# Altium PCB 1000BASET1_MEDIA_CONVERTER.PcbDoc (part 1 of 2)
Units mm, origin at the board's own origin, x right, y up, seen from the top; angles counter-clockwise.
Board outline 96 x 40 mm, 4 copper layers (Top Layer, Mid Layer 1, Mid Layer 2, Bottom Layer), stack 1.586 mm thick; 186 components, 118 nets, 607 pads, 487 vias.
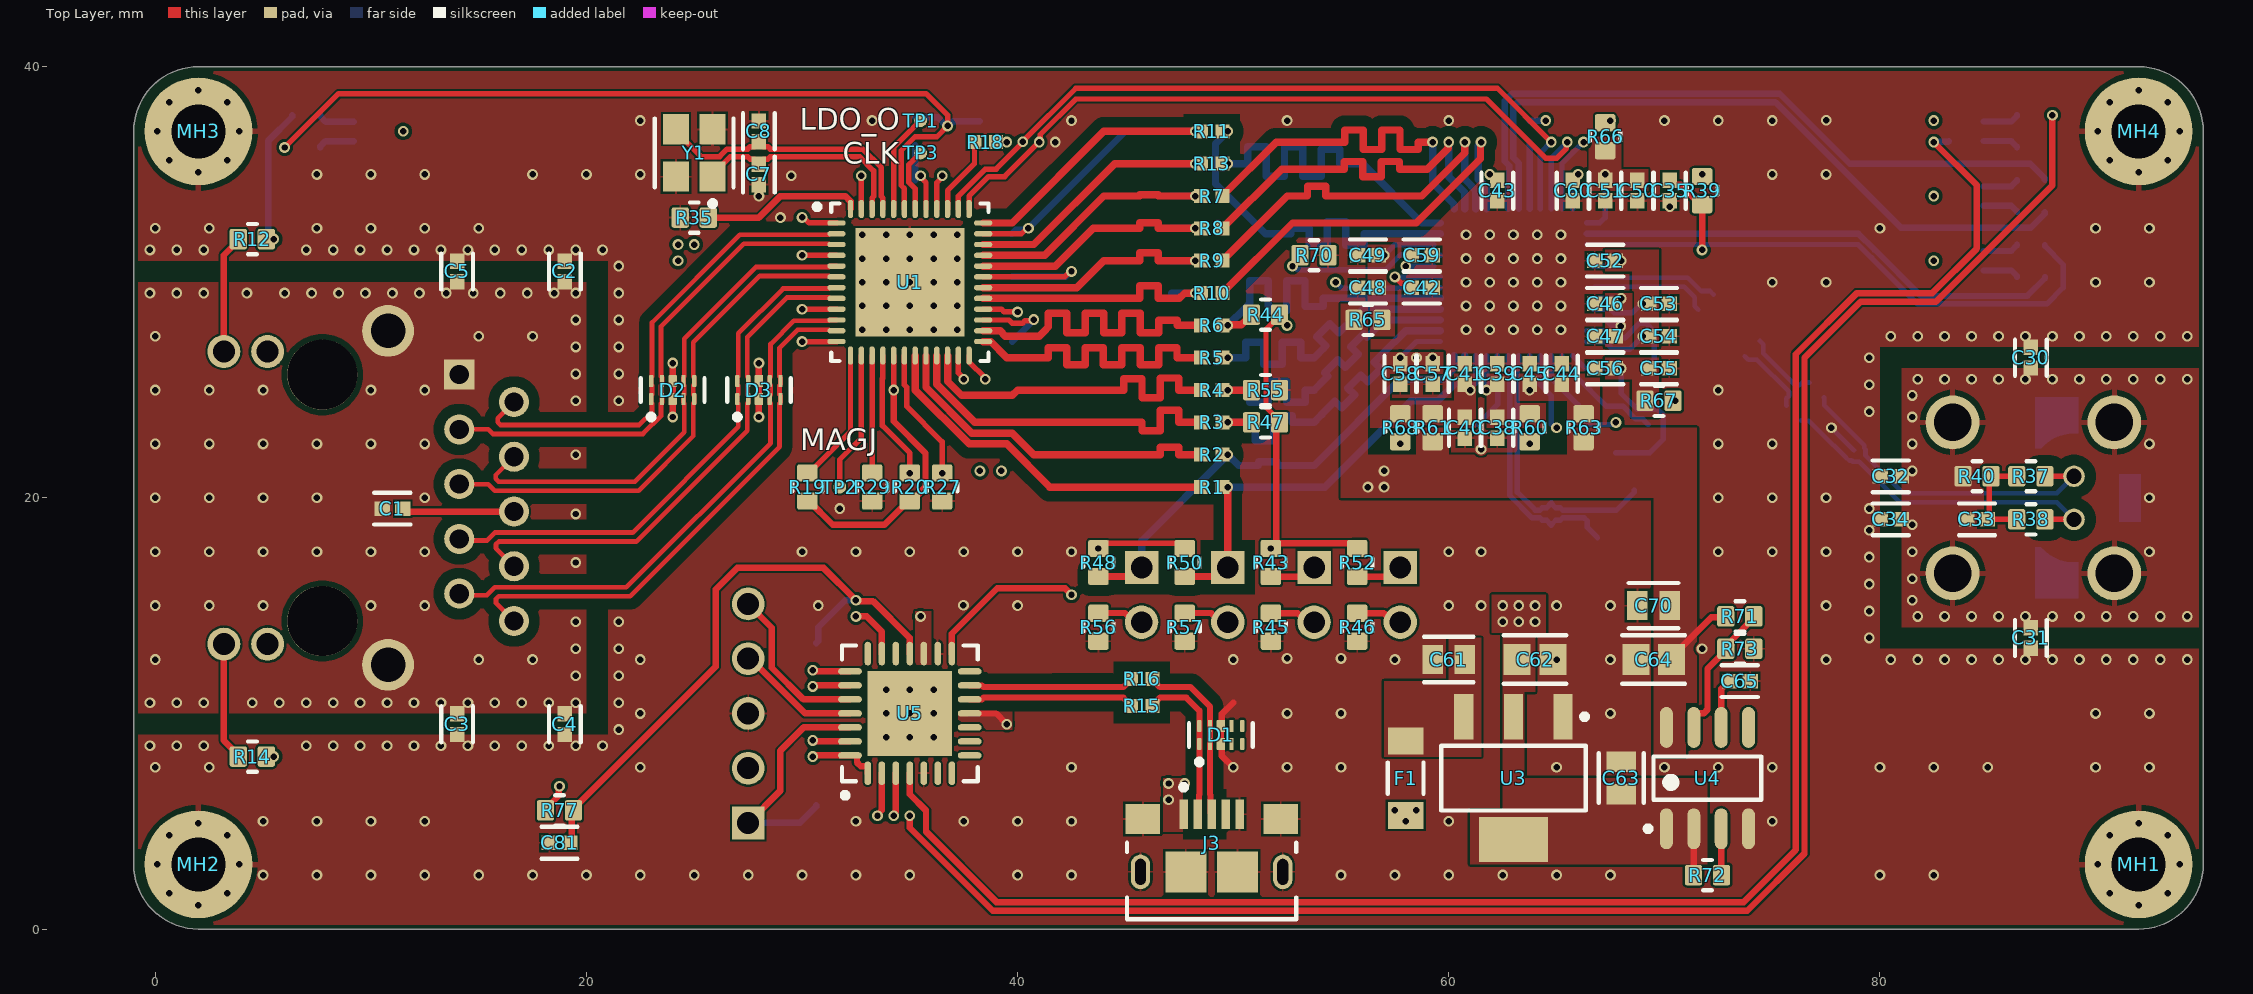
[diagram p0: Top Layer view]
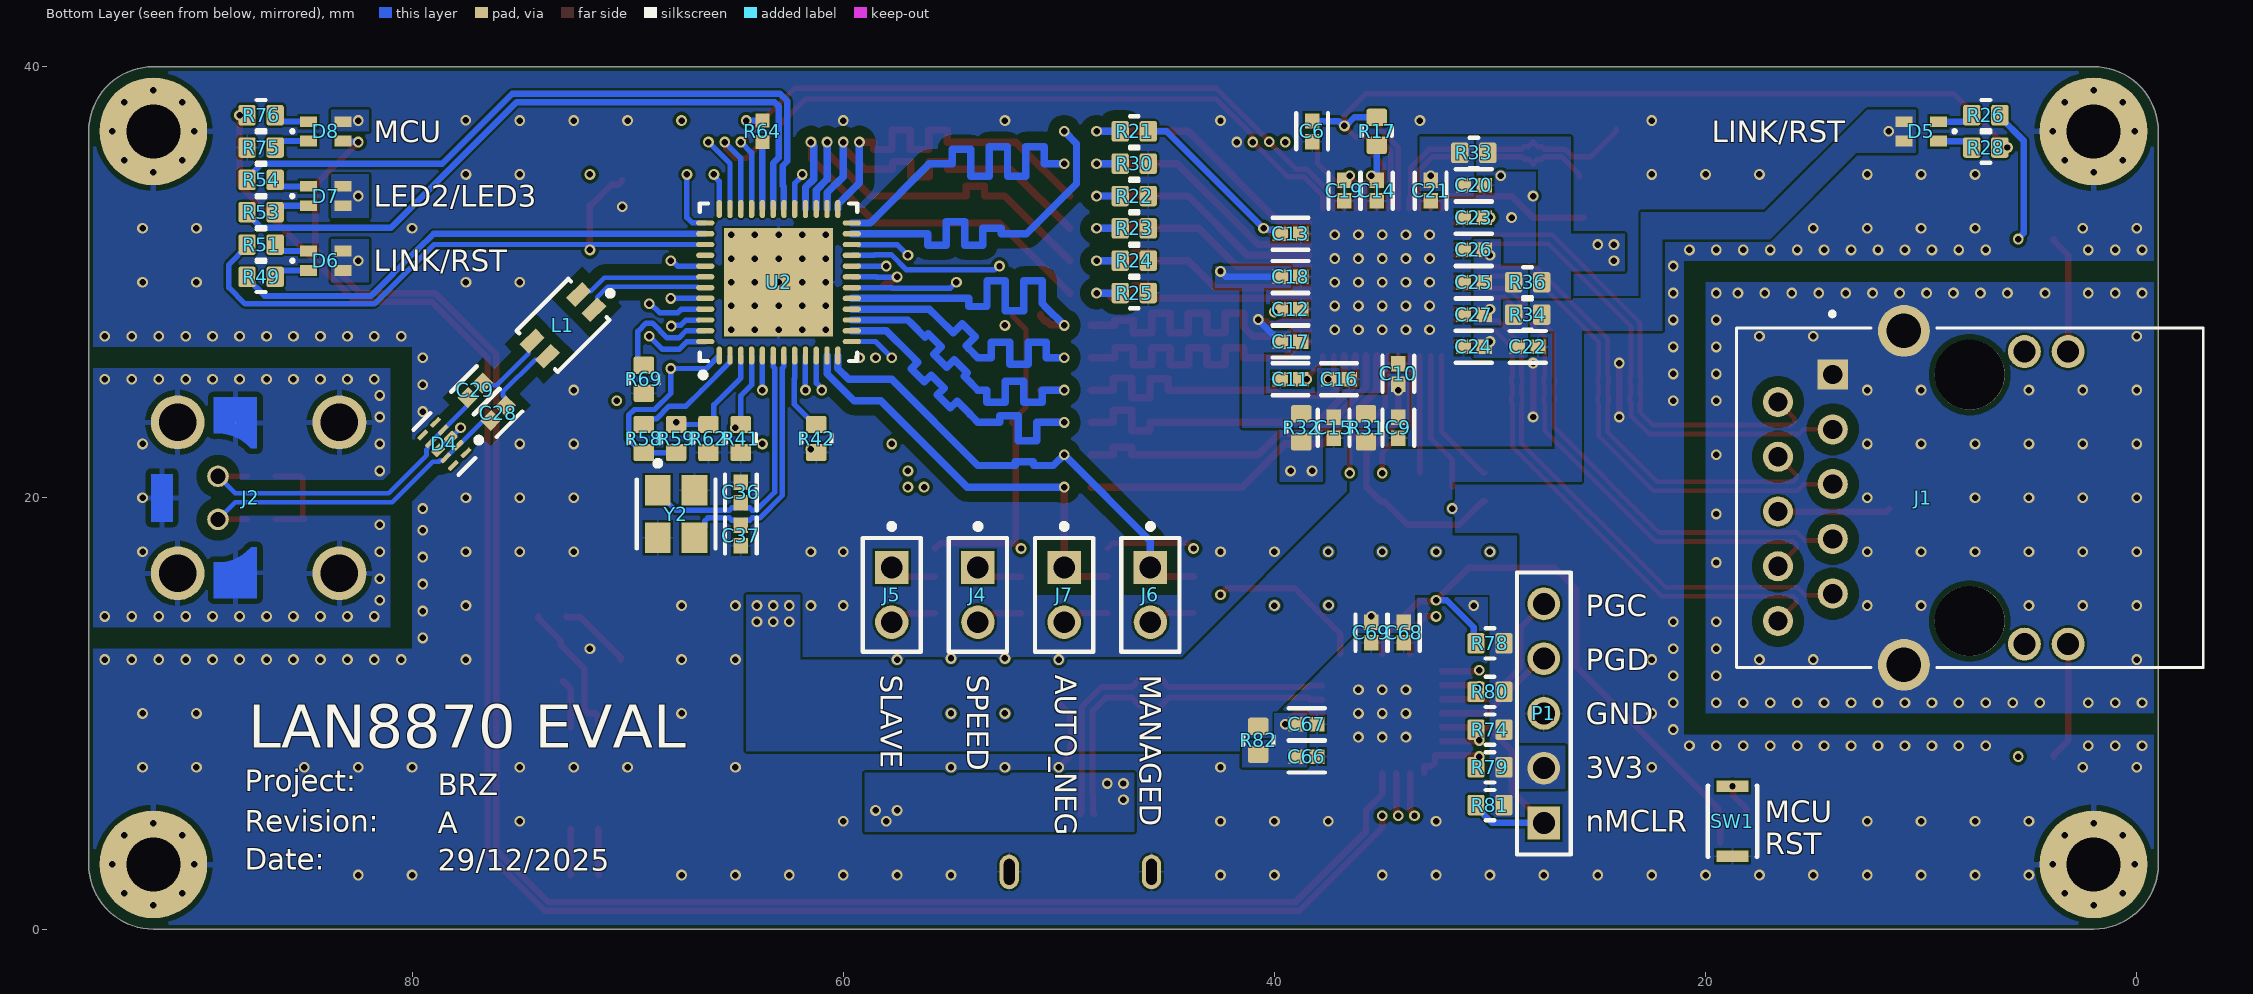
[diagram p1: Bottom Layer view, seen from below]
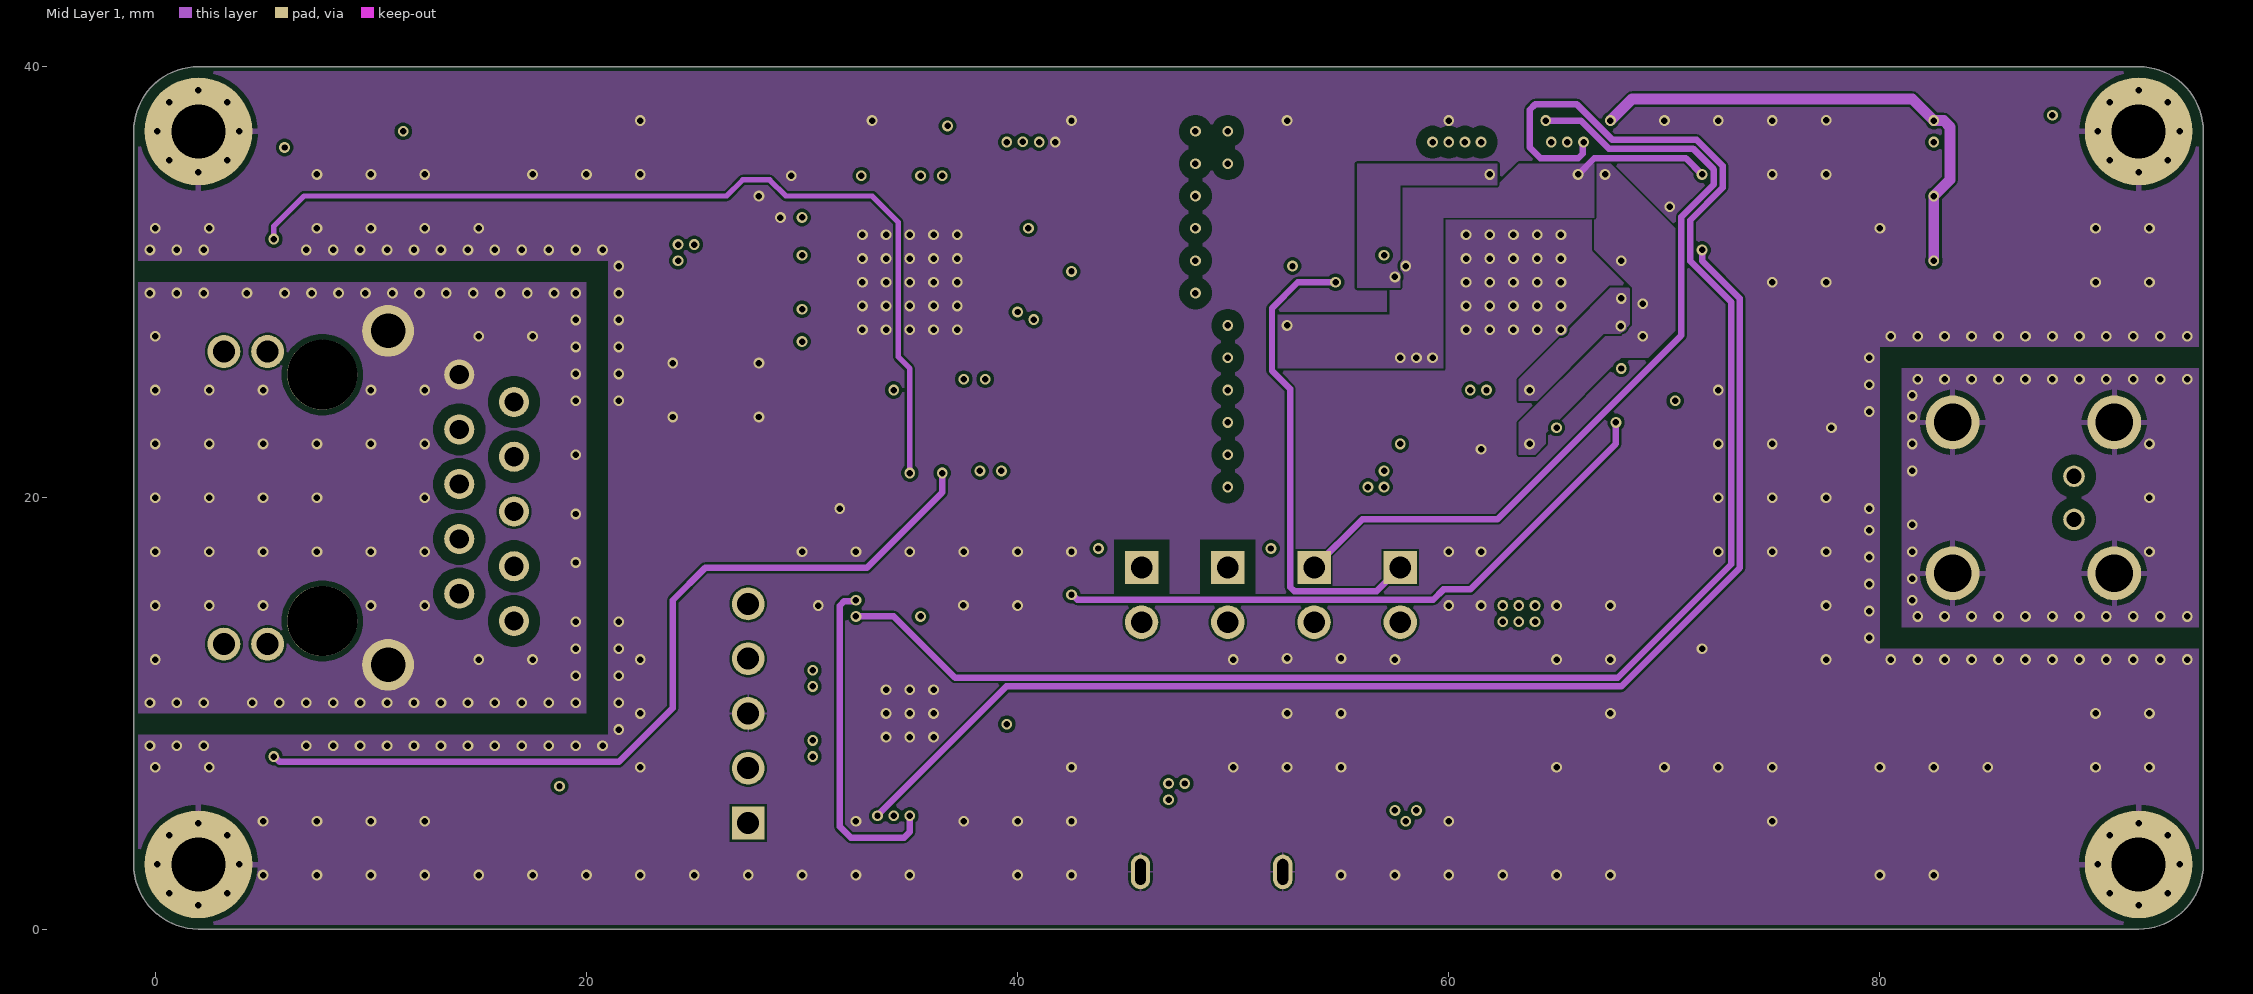
[diagram p2: Mid Layer 1]
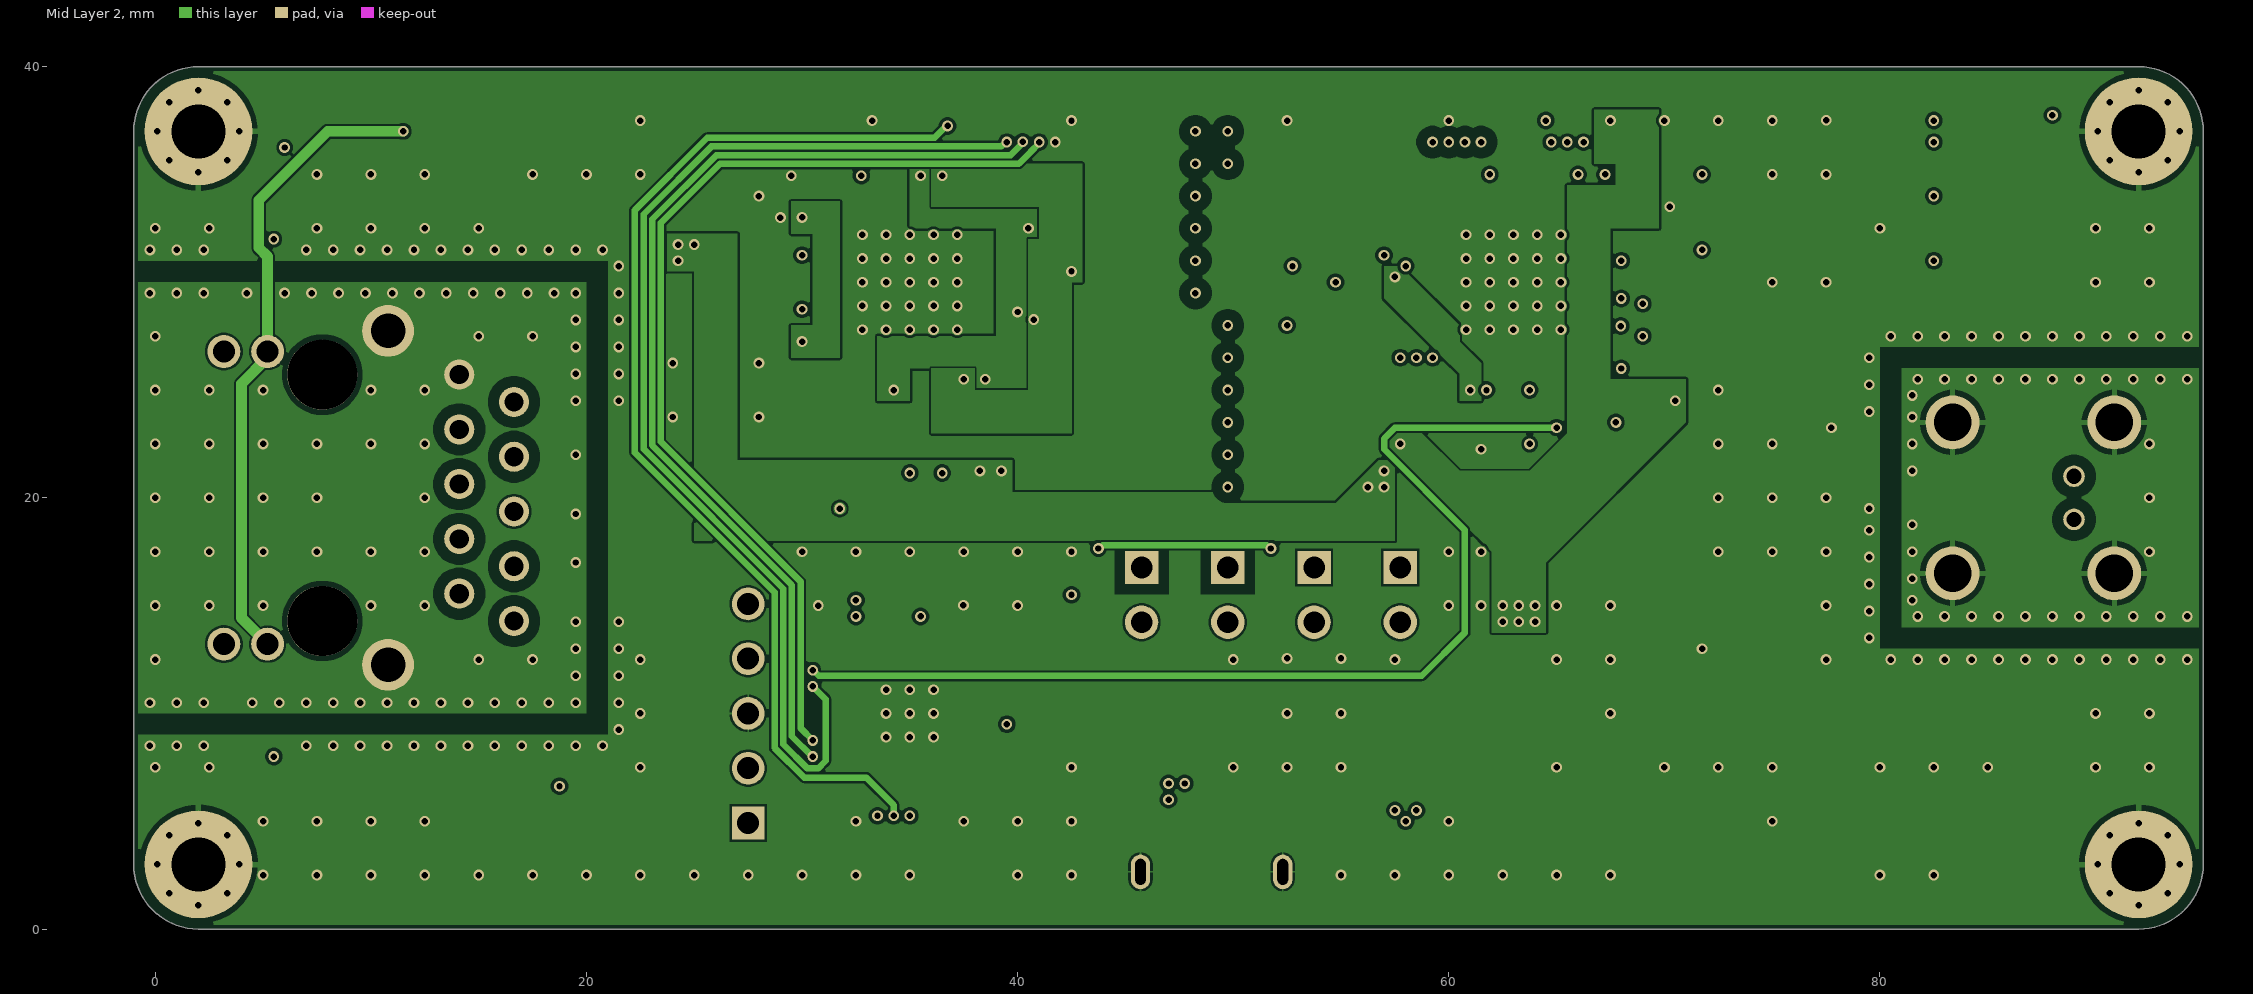
[diagram p3: Mid Layer 2]
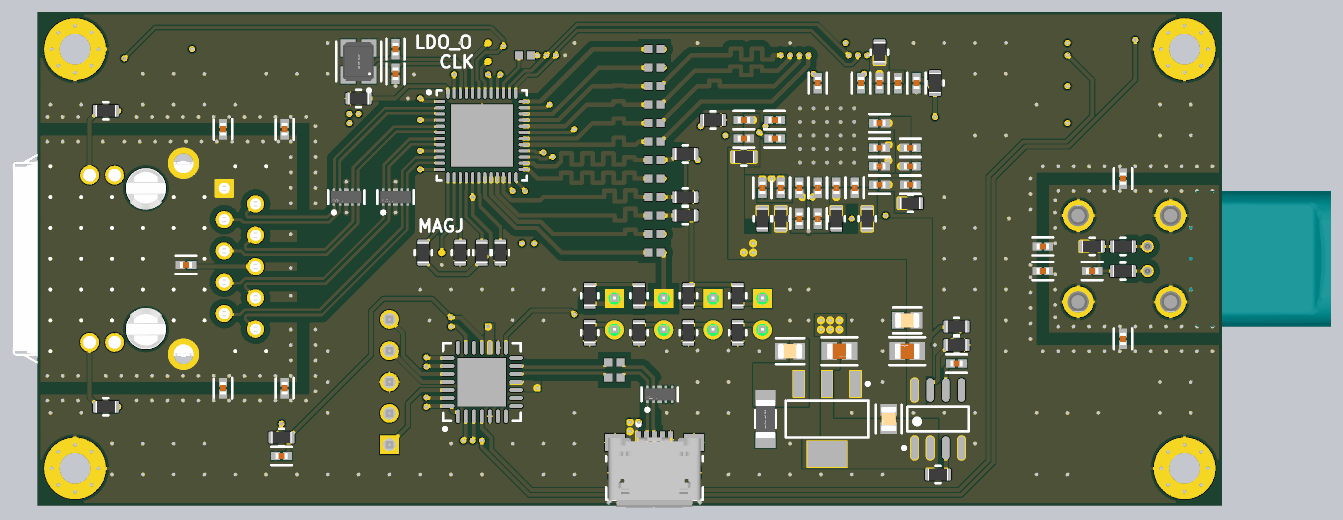
[diagram p5: 3D render of the assembled board from above, using the file's embedded part models]
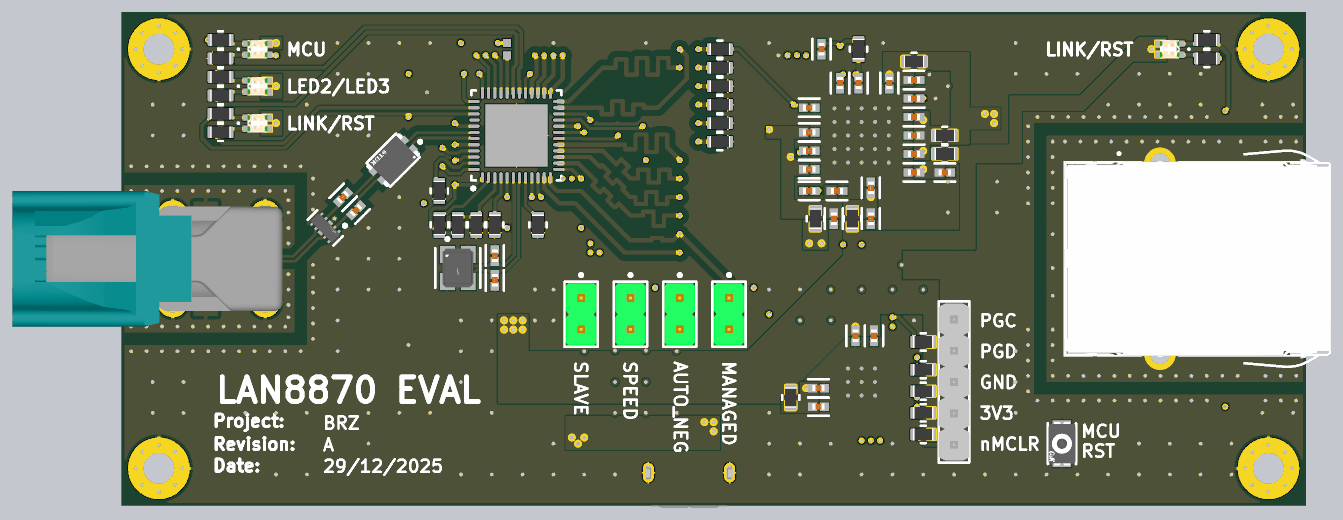
[diagram p6: 3D render of the assembled board from below, using the file's embedded part models]

## Layer stack, top to bottom
Top Solder: solder mask 0.0127, Solder Resist, Dk 3.8
Top Layer: signal copper 0.035
Dielectric 1: prepreg 0.2104, 7628, Dk 4.6
Mid Layer 1: signal copper 0.0152
Core: core 1.065, FR-4, Dk 4.5
Mid Layer 2: signal copper 0.0152
Dielectric 2: prepreg 0.2104, 7628, Dk 4.6
Bottom Layer: signal copper 0.035
Bottom Solder: solder mask 0.0127, Solder Resist, Dk 3.8

## Board outline
-1,3 -1,37 cw(c2,37) 2,40 92,40 cw(c92,37) 95,37 95,3 cw(c92,3) 92,0 2,0 cw(c2,3)

## Design rules (kind name [scope] priority, off if disabled: settings)
BoardOutlineClearance [All] p1: gap=0.2 ignorepadtopadclearanceinfootprint=FALSE
Clearance IMPEDANCE_CLEARANCE [All vs InNetClass('LAN8830_RGMII_TX') OR InNetClass('LAN8830_RGMII_RX') OR  InNetClass('LAN8870_RGMII_TX') OR  InNetClass('LAN8870_RGMII_RX') OR InDifferentialPairClass('100DIFF') OR InDifferentialPairClass('90DIFF')] p1: gap=0.5 ignorepadtopadclearanceinfootprint=FALSE except(0.102: Arc-Arc Arc-Track Arc-SMDPad Arc-THPad Arc-Via Arc-Hole Track-Track Track-SMDPad Track-THPad Track-Via Track-Hole SMDPad-SMDPad SMDPad-THPad SMDPad-Via SMDPad-Hole THPad-THPad THPad-Via THPad-Hole Via-Via Via-Hole Fill-Hole Poly-Hole Region-Hole Text-Hole)
Clearance [All] p2: gap=0.102 ignorepadtopadclearanceinfootprint=FALSE except(0.127: Arc-Via Track-Via SMDPad-Via THPad-Via Via-Via Via-Fill Via-Poly Via-Region Via-Text; 0.25: Arc-Hole Track-Hole SMDPad-Hole THPad-Hole Via-Hole Fill-Hole Poly-Hole Region-Hole Text-Hole)
ComponentClearance [All] p1: gap=0.102 collisioncheckmode=3 verticalgap=0.102 showdistances=TRUE
DiffPairsRouting 100DIFF [InDifferentialPairClass('100DIFF')] p1: maxlimit=0.2 minlimit=0.127 mostfreqgap=0.2 toplayer_mingap=0.2 toplayer_minwidth=0.218 toplayer_maxwidth=0.218 toplayer_prefwidth=0.218 midlayer1_maxgap=0.127 midlayer1_prefgap=0.127 midlayer1_minwidth=0.09 midlayer1_maxwidth=0.09 midlayer1_prefwidth=0.09 midlayer2_maxgap=0.127 midlayer2_prefgap=0.127 midlayer2_minwidth=0.09 midlayer2_maxwidth=0.09 midlayer2_prefwidth=0.09 bottomlayer_mingap=0.2 bottomlayer_minwidth=0.218 bottomlayer_maxwidth=0.218 bottomlayer_prefwidth=0.218 impedanceprofiledriven=TRUE impedanceprofileid={A5F9EB34-5AE2-4A56-96DF-B44525B93255} impedanceprofilevalue=100.000000 maxuncoupledlength=12.7
DiffPairsRouting 90DIFF [InDifferentialPairClass('90DIFF')] p2: maxlimit=0.2 minlimit=0.127 mostfreqgap=0.2 toplayer_mingap=0.2 toplayer_minwidth=0.283 toplayer_maxwidth=0.283 toplayer_prefwidth=0.283 midlayer1_maxgap=0.127 midlayer1_prefgap=0.127 midlayer1_minwidth=0.127 midlayer1_maxwidth=0.127 midlayer1_prefwidth=0.127 midlayer2_maxgap=0.127 midlayer2_prefgap=0.127 midlayer2_minwidth=0.127 midlayer2_maxwidth=0.127 midlayer2_prefwidth=0.127 bottomlayer_mingap=0.2 bottomlayer_minwidth=0.283 bottomlayer_maxwidth=0.283 bottomlayer_prefwidth=0.283 impedanceprofiledriven=TRUE impedanceprofileid={D302AD92-22CC-47D8-8958-C387DBF3B7FB} impedanceprofilevalue=90.000000 maxuncoupledlength=12.7
DiffPairsRouting [All] p3: maxlimit=0.102 minlimit=0.102 mostfreqgap=0.102 toplayer_minwidth=0.102 toplayer_maxwidth=1816.048 toplayer_prefwidth=0.102 midlayer1_minwidth=0.102 midlayer1_maxwidth=1816.048 midlayer1_prefwidth=0.102 midlayer2_minwidth=0.102 midlayer2_maxwidth=1816.048 midlayer2_prefwidth=0.102 bottomlayer_minwidth=0.102 bottomlayer_maxwidth=1816.048 bottomlayer_prefwidth=0.102 maxuncoupledlength=12.7
Height [All] p1: minheight=0 maxheight=1816.048 prefheight=12.7
HoleSize [All] p1: absolutevalues=TRUE maxlimit=6.3 minlimit=0.2 maxpercent=80.000 minpercent=20.000
HoleToHoleClearance [All] p1: gap=0.25 allowstackedmicrovias=FALSE
MatchedLengths LAN8830_RGMII_TX [InNetClass('LAN8830_RGMII_TX')] p1: tolerance=1 checknetsindiffpair=FALSE checkdiffpairvsdiffpair=TRUE checkxsignals=TRUE checkothers=TRUE
MatchedLengths LAN8830_RGMII_RX [InNetClass('LAN8830_RGMII_RX')] p2: tolerance=1 checknetsindiffpair=FALSE checkdiffpairvsdiffpair=TRUE checkxsignals=TRUE checkothers=TRUE
MatchedLengths LAN8870_RGMII_TX [InNetClass('LAN8870_RGMII_TX')] p3: tolerance=1 checknetsindiffpair=FALSE checkdiffpairvsdiffpair=TRUE checkxsignals=TRUE checkothers=TRUE
MatchedLengths LAN8870_RGMII_RX [InNetClass('LAN8870_RGMII_RX')] p4: tolerance=1 checknetsindiffpair=FALSE checkdiffpairvsdiffpair=TRUE checkxsignals=TRUE checkothers=TRUE
MinimumAnnularRing [All] p1: minimumring=0.076
MinimumSolderMaskSliver [All] p1: minsoldermaskwidth=0
PlaneClearance [All] p1: clearance=0.102
PlaneConnect PlaneConnectPowerPads [InPadClass('PowerPads')] p1: planeconnectstyle=Direct reliefexpansion=0.508 reliefentries=4 reliefconductorwidth=0.254 reliefairgap=0.254
PlaneConnect [All] p2: pad.planeconnectstyle=Relief pad.reliefexpansion=0.3 pad.reliefentries=4 pad.reliefconductorwidth=0.102 pad.reliefairgap=0.102 via.planeconnectstyle=Direct via.reliefexpansion=0.3 via.reliefentries=4 via.reliefconductorwidth=0.127 via.reliefairgap=0.127
PolygonConnect PolygonConnectPowerPads [All vs InComponent('C30') or InComponent('C31') or InComponent('C32') or InComponent('C34') or InComponent('C2') or InComponent('C3') or InComponent('C4') or InComponent('C5') OR InComponent('C61') or InComponent('C62') or  InComponent('U3') or InComponent('C63') or  InComponent('U4') or InComponent('C64') or  InNetClass('PWR')] p1: connectstyle=Direct reliefconductorwidth=0.254 reliefentries=4 polygonreliefangle="90 Angle" airgapwidth=0.254
PolygonConnect [All] p2: thpad.connectstyle=Relief thpad.reliefconductorwidth=0.102 thpad.reliefentries=4 thpad.polygonreliefangle="90 Angle" thpad.airgapwidth=0.102 smdpad.connectstyle=Relief smdpad.reliefconductorwidth=0.102 smdpad.reliefentries=4 smdpad.polygonreliefangle="90 Angle" smdpad.airgapwidth=0.102 via.connectstyle=Direct via.reliefconductorwidth=0.127 via.reliefentries=4 via.polygonreliefangle="90 Angle" via.airgapwidth=0.127
RoutingVias [All] p1: holewidth=0.2 width=0.45 viastyle="Through Hole" minholewidth=0.2 minwidth=0.45 maxholewidth=6.3 maxwidth=6.55
SilkToSilkClearance [All] p1: silktosilkclearance=0
SilkToSolderMaskClearance [IsPad] p1: minsilkscreentomaskgap=0.102 clearancetoexposedcopper=TRUE
SolderMaskExpansion [All] p1: expansion=0.075 istentingtop=FALSE
SupplyNets "Schematic Supply Nets_7" [InNet('LAN8870_VDDIO')] p1: voltage=0.000
SupplyNets "Schematic Supply Nets_6" [InNet('VDDIO_8830')] p2: voltage=0.000
SupplyNets "Schematic Supply Nets_5" [InNet('LAN8870_VBAT')] p3: voltage=0.000
SupplyNets "Schematic Supply Nets_4" [InNet('GND')] p4: voltage=0.000
SupplyNets "Schematic Supply Nets_3" [InNet('1V1')] p5: voltage=0.000
SupplyNets "Schematic Supply Nets_2" [InNet('3V3')] p6: voltage=0.000
SupplyNets "Schematic Supply Nets_1" [InNet('RJ45_GND')] p7: voltage=0.000
SupplyNets "Schematic Supply Nets" [InNet('MATENET_GND')] p8: voltage=0.000
Width 50SINGLE [InNetClass('LAN8830_RGMII_TX') OR InNetClass('LAN8830_RGMII_RX') OR  InNetClass('LAN8870_RGMII_TX') OR  InNetClass('LAN8870_RGMII_RX')] p1: maxlimit=0.345 minlimit=0.177 preferedwidth=0.345 toplayer_minwidth=0.345 midlayer1_maxwidth=0.177 midlayer1_prefwidth=0.177 midlayer2_maxwidth=0.177 midlayer2_prefwidth=0.177 bottomlayer_minwidth=0.345 impedanceprofiledriven=TRUE impedanceprofileid={7C6CEF96-1CD0-4116-AD26-51C1652EE54F} impedanceprofilevalue=50.000000 minimp=50.000000 maximp=50.000000 favimp=50.000000
Width [All] p2: maxlimit=1816.048 minlimit=0.102 preferedwidth=0.102
20 further rules are at their usual default settings.

## Classes and differential pairs
net class PWR: 1V1 3V3 LAN8870_VBAT LAN8870_VDDA LAN8870_VDDIO MATENET_GND NetC15_1 NetC20_1 NetC22_1 NetC25_1 NetC38_1 NetC40_1 NetC44_1 NetC48_1 NetC61_1 NetC66_1 NetF1_1 RJ45_GND VDDIO_8830
net class LAN8870_RGMII_TX: NetR7_2 NetR8_2 NetR9_2 NetR10_2 NetR11_2 NetR13_2
net class LAN8830_RGMII_RX: LAN8830_CLK125_EN LAN8830_MODE0 LAN8830_MODE1 LAN8830_MODE2 LAN8830_MODE3 LAN8830_MODE4
net class LAN8830_RGMII_TX: NetR1_1 NetR2_1 NetR3_1 NetR4_1 NetR5_1 NetR6_1
net class LAN8870_RGMII_RX: LAN8870_RXCTL LAN8870_RXD0 LAN8870_RXD1 LAN8870_RXD2 LAN8870_RXD3 NetR5_2
differential pair class 90DIFF: USB_CONN USB_MCU
differential pair class 100DIFF: LAN8830_TXRXA LAN8830_TXRXB LAN8830_TXRXC LAN8830_TXRXD TRX TRX_CON TRX_TERM
component class PWR_MGMT: C61 C62 C63 C64 C65 C70 F1 R71 R72 R73 U3 U4
component class MGMT_MCU: C66 C67 C68 C69 C81 D8 P1 R74 R75 R76 R77 R78 R79 R80 R81 R82 SW1 U5
component class 1000BASET1_MEDIA_CONVERTER: C1 C2 C3 C4 C5 D1 D2 D3 D4 J1 J2 J3 MH1 MH2 MH3 MH4 R1 R2 R3 R4 R5 R6 R7 R8 R9 R10 R11 R12 R13 R14 R15 R16
component class 1000_BASE_T_PHY: C6 C7 C8 C9 C10 C11 C12 C13 C14 C15 C16 C17 C18 C19 C20 C21 C22 C23 C24 C25 C26 C27 D5 R17 R18 R19 R20 R21 R22 R23 R24 R25 R26 R27 R28 R29 R30 R31 R32 R33 R34 R35 R36 TP1 TP2 TP3 U1 Y1
component class 1000_BASE_T1_PHY: C28 C29 C30 C31 C32 C33 C34 C35 C36 C37 C38 C39 C40 C41 C42 C43 C44 C45 C46 C47 C48 C49 C50 C51 C52 C53 C54 C55 C56 C57 C58 C59 C60 D6 D7 J4 J5 J6 J7 L1 R37 R38 R39 R40 R41 R42 R43 R44 R45 R46 R47 R48 R49 R50 R51 R52 R53 R54 R55 R56 R57 R58 R59 R60 R61 R62 R63 R64 R65 R66 R67 R68 R69 R70 U2 Y2
differential pair USB_MCU: +USB_MCU_P -USB_MCU_N
differential pair LAN8870_X25: +LAN8870_X25_P -LAN8870_X25_N
differential pair LAN8830_X25: +LAN8830_X25_P -LAN8830_X25_N
differential pair USB_CONN: +USB_CONN_P -USB_CONN_N
differential pair TRX: +TRX_P -TRX_N
differential pair TRX_TERM: +TRX_TERM_P -TRX_TERM_N
differential pair TRX_CON: +TRX_CON_P -TRX_CON_N
differential pair LAN8830_TXRXD: +LAN8830_TXRXD_P -LAN8830_TXRXD_N
differential pair LAN8830_TXRXC: +LAN8830_TXRXC_P -LAN8830_TXRXC_N
differential pair LAN8830_TXRXB: +LAN8830_TXRXB_P -LAN8830_TXRXB_N
differential pair LAN8830_TXRXA: +LAN8830_TXRXA_P -LAN8830_TXRXA_N

## Components (designator, comment, footprint, x,y, rotation, side; value= is the part's Value field where it differs from the comment)
C1 "100n" FP-0402-L_1_0_0_05-W_0_5-IPC_A 11,19.5 r180 top
C2 "JUMP" FP-0402-L_1_0_0_05-W_0_5-IPC_A 19,30.5 r90 top
C3 "JUMP" FP-0402-L_1_0_0_05-W_0_5-IPC_A 14,9.5 r270 top
C4 "JUMP" FP-0402-L_1_0_0_05-W_0_5-IPC_A 19,9.5 r270 top
C5 "JUMP" FP-0402-L_1_0_0_05-W_0_5-IPC_A 14,30.5 r90 top
C6 "1u" FP-0402-L_1_0_0_05-W_0_5-IPC_A 38.25,37 r270 bottom
C7 "30p" FP-0402-L_1_0_0_05-W_0_5-IPC_A 28,35 r270 top
C8 "30p" FP-0402-L_1_0_0_05-W_0_5-IPC_A 28,37 r90 top
C9 "1u" FP-0402-L_1_0_0_05-W_0_5-IPC_A 34.25,23.25 r270 bottom
C10 "100n" FP-0402-L_1_0_0_05-W_0_5-IPC_A 34.25,25.75 r90 bottom
C11 "100n" FP-0402-L_1_0_0_05-W_0_5-IPC_A 39.25,25.5 r0 bottom
C12 "100n" FP-0402-L_1_0_0_05-W_0_5-IPC_A 39.25,28.75 r180 bottom
C13 "100n" FP-0402-L_1_0_0_05-W_0_5-IPC_A 39.25,32.25 r180 bottom
C14 "100n" FP-0402-L_1_0_0_05-W_0_5-IPC_A 35.25,34.25 r270 bottom
C15 "10u" FP-0402-L_1_0_0_05-W_0_5-IPC_A 37.25,23.25 r270 bottom
C16 "100n" FP-0402-L_1_0_0_05-W_0_5-IPC_A 37,25.5 r180 bottom
C17 "100n" FP-0402-L_1_0_0_05-W_0_5-IPC_A 39.25,27.25 r180 bottom
C18 "100n" FP-0402-L_1_0_0_05-W_0_5-IPC_A 39.25,30.25 r180 bottom
C19 "100n" FP-0402-L_1_0_0_05-W_0_5-IPC_A 36.75,34.25 r270 bottom
C20 "1u" FP-0402-L_1_0_0_05-W_0_5-IPC_A 30.75,34.5 r180 bottom
C21 "100n" FP-0402-L_1_0_0_05-W_0_5-IPC_A 32.75,34.25 r270 bottom
C22 "10u" FP-0402-L_1_0_0_05-W_0_5-IPC_A 28.25,27 r180 bottom
C23 "100n" FP-0402-L_1_0_0_05-W_0_5-IPC_A 30.75,33 r0 bottom
C24 "100n" FP-0402-L_1_0_0_05-W_0_5-IPC_A 30.75,27 r0 bottom
C25 "1u" FP-0402-L_1_0_0_05-W_0_5-IPC_A 30.75,30 r0 bottom
C26 "100n" FP-0402-L_1_0_0_05-W_0_5-IPC_A 30.75,31.5 r0 bottom
C27 "100n" FP-0402-L_1_0_0_05-W_0_5-IPC_A 30.75,28.5 r0 bottom
C28 "100n" FP-0402-L_1_0_0_05-W_0_5-IPC_A 76.005,23.934 r315 bottom
C29 "100n" FP-0402-L_1_0_0_05-W_0_5-IPC_A 77.066,24.995 r315 bottom
C30 "JUMP" FP-0402-L_1_0_0_05-W_0_5-IPC_A 87,26.5 r90 top
C31 "JUMP" FP-0402-L_1_0_0_05-W_0_5-IPC_A 87,13.5 r270 top
C32 "JUMP" FP-0402-L_1_0_0_05-W_0_5-IPC_A 80.5,21 r180 top
C33 "4.7n" FP-0402-L_1_0_0_05-W_0_5-IPC_A 84.5,19 r0 top
C34 "JUMP" FP-0402-L_1_0_0_05-W_0_5-IPC_A 80.5,19 r180 top
C35 "1u" FP-0402-L_1_0_0_05-W_0_5-IPC_A 70.25,34.25 r270 top
C36 "30p" FP-0402-L_1_0_0_05-W_0_5-IPC_A 64.75,20.25 r90 bottom
C37 "30p" FP-0402-L_1_0_0_05-W_0_5-IPC_A 64.75,18.25 r270 bottom
C38 "4.7u" FP-0402-L_1_0_0_05-W_0_5-IPC_A 62.25,23.25 r270 top
C39 "100n" FP-0402-L_1_0_0_05-W_0_5-IPC_A 62.25,25.75 r90 top
C40 "1u" FP-0402-L_1_0_0_05-W_0_5-IPC_A 60.75,23.25 r270 top
C41 "100n" FP-0402-L_1_0_0_05-W_0_5-IPC_A 60.75,25.75 r90 top
C42 "100n" FP-0402-L_1_0_0_05-W_0_5-IPC_A 58.75,29.75 r0 top
C43 "100n" FP-0402-L_1_0_0_05-W_0_5-IPC_A 62.25,34.25 r270 top
C44 "1u" FP-0402-L_1_0_0_05-W_0_5-IPC_A 65.25,25.75 r90 top
C45 "100n" FP-0402-L_1_0_0_05-W_0_5-IPC_A 63.75,25.75 r90 top
C46 "100n" FP-0402-L_1_0_0_05-W_0_5-IPC_A 67.25,29 r180 top
C47 "100n" FP-0402-L_1_0_0_05-W_0_5-IPC_A 67.25,27.5 r180 top
C48 "100n" FP-0402-L_1_0_0_05-W_0_5-IPC_A 56.25,29.75 r180 top
C49 "4.7u" FP-0402-L_1_0_0_05-W_0_5-IPC_A 56.25,31.25 r180 top
C50 "4.7u" FP-0402-L_1_0_0_05-W_0_5-IPC_A 68.75,34.25 r270 top
C51 "100n" FP-0402-L_1_0_0_05-W_0_5-IPC_A 67.25,34.25 r270 top
C52 "100n" FP-0402-L_1_0_0_05-W_0_5-IPC_A 67.25,31 r180 top
C53 "100n" FP-0402-L_1_0_0_05-W_0_5-IPC_A 69.75,29 r0 top
C54 "100n" FP-0402-L_1_0_0_05-W_0_5-IPC_A 69.75,27.5 r0 top
C55 "4.7u" FP-0402-L_1_0_0_05-W_0_5-IPC_A 69.75,26 r0 top
C56 "100n" FP-0402-L_1_0_0_05-W_0_5-IPC_A 67.25,26 r180 top
C57 "4.7u" FP-0402-L_1_0_0_05-W_0_5-IPC_A 59.25,25.75 r270 top
C58 "100n" FP-0402-L_1_0_0_05-W_0_5-IPC_A 57.75,25.75 r270 top
C59 "100n" FP-0402-L_1_0_0_05-W_0_5-IPC_A 58.75,31.25 r0 top
C60 "100n" FP-0402-L_1_0_0_05-W_0_5-IPC_A 65.75,34.25 r270 top
C61 "C0805C475J4RACAUTO" FP-C0805C475J4RACAUTO-MFG 60,12.5 r180 top
C62 "GRM21BR61E226ME44L" FP-GRM21B-0_2-e0_2_0_7-IPC_B 64,12.5 r0 top
C63 "C0805C475J4RACAUTO" FP-C0805C475J4RACAUTO-MFG 68,7 r90 top
C64 "GRM21BR61E226ME44L" FP-GRM21B-0_2-e0_2_0_7-IPC_B 69.5,12.5 r180 top
C65 "DNP" FP-0402-L_1_0_0_05-W_0_5-IPC_A 73.5,11.5 r0 top
C66 "1u" FP-0402-L_1_0_0_05-W_0_5-IPC_A 38.5,8 r180 bottom
C67 "100n" FP-0402-L_1_0_0_05-W_0_5-IPC_A 38.5,9.5 r180 bottom
C68 "1u" FP-0402-L_1_0_0_05-W_0_5-IPC_A 34,13.75 r270 bottom
C69 "100n" FP-0402-L_1_0_0_05-W_0_5-IPC_A 35.5,13.75 r270 bottom
C70 "C0805C475J4RACAUTO" FP-C0805C475J4RACAUTO-MFG 69.5,15 r180 top
C81 "100n" FP-0402-L_1_0_0_05-W_0_5-IPC_A 18.75,4 r180 top
D1 "ESD204DQAR or PUSB3AB4Z" FP-DQA0010A-MFG 49.425,9 r90 top value=0.55pF
D2 "ESD204DQAR or PUSB3AB4Z" FP-DQA0010A-MFG 24,25 r90 top value=0.55pF
D3 "ESD204DQAR or PUSB3AB4Z" FP-DQA0010A-MFG 28,25 r90 top value=0.55pF
D4 "ESD204DQAR or PUSB3AB4Z" FP-DQA0010A-MFG 78.5,22.5 r315 bottom value=0.55pF
D5 "150066RG54050" WL-SBCD_0606 10,37 r270 bottom
D6 "150066RG54050" WL-SBCD_0606 84,31 r90 bottom
D7 "150066RG54050" WL-SBCD_0606 84,34 r90 bottom
D8 "150066RG54050" WL-SBCD_0606 84,37 r90 bottom
F1 "SF-1206FP200-2" FP-SF-1206FP-MFG 58,7 r90 top
J1 "RJMG201K21120FR" RJMG201K21120FR-Footprint-1 7.75,20 r90 bottom
J2 "E6S20A-40MT5-Z" E6S20A-40MT5-Z-Footprint-1 89,20 r90 bottom
J3 "10118193-0001LF" FCI-10118193-0001LF-5_V 49,4 r0 top
J4 "826629-2" FP-826629-2-MFG 53.75,15.5 r270 bottom
J5 "826629-2" FP-826629-2-MFG 57.75,15.5 r270 bottom
J6 "826629-2" FP-826629-2-MFG 45.75,15.5 r270 bottom
J7 "826629-2" FP-826629-2-MFG 49.75,15.5 r270 bottom
L1 "ACT1210G-800-2P-TL10" FP-ACT1210G-800-2P-TL10-MFG 73,28 r315 bottom
MH1 "PTHV6" "PTHV6 M2" 92,3 r0 top net-tie
MH2 "PTHV6" "PTHV6 M2" 2,3 r0 top net-tie
MH3 "PTHV6" "PTHV6 M2" 2,37 r0 top net-tie
MH4 "PTHV6" "PTHV6 M2" 92,37 r0 top net-tie
P1 "MTLW-105-05-G-S-190" SMTC-MTLW-105-05-X-S-190 27.5,4.92 r90 bottom
R1 "0402 JUMPER" RESC1005X40X25ML05T05 49,20.5 r0 top
R2 "0402 JUMPER" RESC1005X40X25ML05T05 49,22 r0 top
R3 "0402 JUMPER" RESC1005X40X25ML05T05 49,23.5 r0 top
R4 "0402 JUMPER" RESC1005X40X25ML05T05 49,25 r0 top
R5 "0402 JUMPER" RESC1005X40X25ML05T05 49,26.5 r0 top
R6 "0402 JUMPER" RESC1005X40X25ML05T05 49,28 r0 top
R7 "0402 JUMPER" RESC1005X40X25ML05T05 49,34 r0 top
R8 "0402 JUMPER" RESC1005X40X25ML05T05 49,32.5 r0 top
R9 "0402 JUMPER" RESC1005X40X25ML05T05 49,31 r0 top
R10 "0402 JUMPER" RESC1005X40X25ML05T05 49,29.5 r0 top
R11 "0402 JUMPER" RESC1005X40X25ML05T05 49,37 r0 top
R12 "1k" R0603B 4.5,32 r180 top
R13 "0402 JUMPER" RESC1005X40X25ML05T05 49,35.5 r0 top
R14 "1k" R0603B 4.5,8 r180 top
R15 "0402 JUMPER" RESC1005X40X25ML05T05 45.75,10.35 r180 top
R16 "0402 JUMPER" RESC1005X40X25ML05T05 45.75,11.6 r180 top
R17 "100k" R0603B 35.25,37 r90 bottom
R18 "0402 JUMPER" RESC1005X40X25ML05T05 38.5,36.5 r180 top
R19 "4.7k" R0603B 30.25,20.5 r90 top
R20 "4.7k" R0603B 35,20.5 r90 top
R21 "4.7k" R0603B 46.5,37 r0 bottom
R22 "1k" R0603B 46.5,34 r0 bottom
R23 "1k" R0603B 46.5,32.5 r0 bottom
R24 "1k" R0603B 46.5,31 r0 bottom
R25 "1k" R0603B 46.5,29.5 r0 bottom
R26 "1k" R0603B 7,37.75 r180 bottom
R27 "1k" R0603B 36.5,20.5 r90 top
R28 "1k" R0603B 7,36.25 r180 bottom
R29 "1k" R0603B 33.25,20.5 r90 top
R30 "1k" R0603B 46.5,35.5 r0 bottom
R31 "JUMP" R0603B 35.75,23.25 r90 bottom value=0
R32 "JUMP" R0603B 38.75,23.25 r90 bottom value=0
R33 "JUMP" R0603B 30.75,36 r0 bottom value=0
R34 "JUMP" R0603B 28.25,28.5 r0 bottom value=0
R35 "6.04k" R0603B 25,33 r180 top
R36 "JUMP" R0603B 28.25,30 r0 bottom value=0
R37 "1k" R0603B 87,21 r0 top value=100k
R38 "1k" R0603B 87,19 r0 top value=100k
R39 "100k" R0603B 71.75,34.25 r270 top
R40 "100k" R0603B 84.5,21 r180 top
R41 "100k" R0603B 64.75,22.75 r270 bottom
R42 "4.7k" R0603B 61.25,22.75 r270 bottom value=100k
R43 "10k" R0603B 51.75,17 r90 top value=100k
R44 "10k" R0603B 51.5,28.5 r180 top value=100k
R45 "1k" R0603B 51.75,14 r90 top value=100k
R46 "1k" R0603B 55.75,14 r90 top value=100k
R47 "10k" R0603B 51.5,23.5 r0 top value=100k
R48 "10k" R0603B 43.75,17 r90 top value=100k
R49 "1k" R0603B 87,30.25 r0 bottom value=100k
R50 "10k" R0603B 47.75,17 r90 top value=100k
R51 "1k" R0603B 87,31.75 r0 bottom value=100k
R52 "10k" R0603B 55.75,17 r90 top value=100k
R53 "1k" R0603B 87,33.25 r0 bottom value=100k
R54 "1k" R0603B 87,34.75 r0 bottom value=100k
R55 "1k" R0603B 51.5,25 r180 top value=100k
R56 "1k" R0603B 43.75,14 r90 top value=100k
R57 "1k" R0603B 47.75,14 r90 top value=100k
R58 "DNP" R0603B 69.25,22.75 r90 bottom value=100k
R59 "DNP" R0603B 67.75,22.75 r90 bottom value=100k
R60 "JUMP" R0603B 63.75,23.25 r90 top value=0
R61 "JUMP" R0603B 59.25,23.25 r90 top value=0
R62 "4.7k" R0603B 66.25,22.75 r270 bottom value=100k
R63 "JUMP" R0603B 66.25,23.25 r90 top value=0
R64 "0402 JUMPER" RESC1005X40X25ML05T05 63.75,37 r90 bottom
R65 "JUMP" R0603B 56.25,28.25 r0 top value=0
R66 "JUMP" R0603B 67.25,36.75 r270 top value=0
R67 "JUMP" R0603B 69.75,24.5 r180 top value=0
R68 "JUMP" R0603B 57.75,23.25 r90 top value=0
R69 "12.1k" R0603B 69.25,25.5 r270 bottom value=100k
R70 "200" R0603B 53.75,31.25 r0 top value=100k
R71 "16.9k" R0603B 73.5,14.5 r180 top
R72 "100k" R0603B 72,2.5 r0 top
R73 "10k" R0603B 73.5,13 r180 top
R74 "2.7k" R0603B 30,9.25 r0 bottom
R75 "1k" R0603B 87,36.25 r180 bottom
R76 "1k" R0603B 87,37.75 r180 bottom
R77 "330" R0603B 18.75,5.5 r180 top
R78 "10k" R0603B 30,13.25 r0 bottom
R79 "2.7k" R0603B 30,7.5 r180 bottom
R80 "10k" R0603B 30,11 r180 bottom
R81 "10k" R0603B 30,5.75 r180 bottom
R82 "JUMP" R0603B 40.75,8.75 r270 bottom value=0
SW1 "KXT331LHS" FP-KXT331LHS-MFG 18.75,5 r270 bottom
TP1 "TPAD6R" "New footprint 1" 35.5,37.5 r90 top
TP2 "TPAD6R" "New footprint 1" 31.75,20.5 r90 top
TP3 "TPAD6R" "New footprint 1" 35.5,36 r90 top
U1 "LAN8830-V/PSA" QFN50P700X700X100_HS-49N 35,30 r0 top
U2 "LAN8870T-I/PUA" QFN50P700X700X100_HS-49N 63,30 r90 bottom
U3 "LD1117S33TR" SOT-223_L 63,7 r270 top
U4 "MCP1726T-ADJE/SN" SOIC-SN8_L 72,7 r90 top
U5 "PIC18LF25K50-I/ML" QFN65P600X600X100_HS-29N 35,10 r90 top
Y1 "ABM8G-25.000MHZ-18-D2Y-T" FP-ABM8G-MFG 25,36 r90 top
Y2 "ABM8G-25.000MHZ-18-D2Y-T" FP-ABM8G-MFG 67.75,19.25 r270 bottom

## Footprints (in the part's own frame and the unit in brackets; to place one, negate y for a bottom-side part, rotate by r counter-clockwise, add the part's x,y. Pads: shape width x height; smd on the part's side, far side on the other; paste and mask are expansions set on the pad)
E6S20A-40MT5-Z-Footprint-1 [mm]
  round 1 hole 0.7: 1(-1,0) 2(1,0)
  round 2.5 hole 1.74: 3(-3.5,-5.63) 3(-3.5,1.87) 3(3.5,-5.63) 3(3.5,1.87)
  round 0.025 smd: 3(-3.475,-0.8) 3(0,2.6) 3(3.475,-0.8)
  Top Layer region: 2.3,-1.805 4.65,-1.805 4.655,-1.8 4.655,0.2 4.647,0.204 2.99,0.204 2.985,0.198 2.992,0.099 2.995,0 2.995,0 2.814,-0.829 2.305,-1.508 2.305,-1.508 2.295,-1.532
  Top Layer region: -2.3,-1.805 -4.65,-1.805 -4.655,-1.8 -4.655,0.2 -4.647,0.204 -2.99,0.204 -2.985,0.198 -2.992,0.099 -2.995,0 -2.995,0 -2.814,-0.829 -2.305,-1.508 -2.305,-1.508 -2.295,-1.532
  Top Layer region: -1.1,2.1 1.1,2.1 1.1,3.1 -1.1,3.1
  body extent -5.5,-7.04 5.5,14.86, height 12.8
FCI-10118193-0001LF-5_V [mm] "Micro, USB-B, 5-Leads, Body 7.86x5.05mm, Pitch 0.65 mm"
  rect 0.4x1.35 smd: 1(-1.3,1.325) 2(-0.65,1.325) 3(0,1.325) 4(0.65,1.325) 5(1.3,1.325)
  rect 1.6x1.4 smd: 6(-3.2,1.1) 7(3.2,1.1)
  rect 1.9x1.9 smd: 8(-1.2,-1.35) 9(1.2,-1.35)
  oval 0.9x1.6 hole 0.5 slot 1.2 at 90 deg: 10(-3.3,-1.35) 11(3.3,-1.35)
  silkscreen extent -3.93,-3.55 3.93,2.7, body extent -3.93,-4.16 3.93,1.5, height 2.83
FP-0402-L_1_0_0_05-W_0_5-IPC_A [mm]
  rect 0.715x0.672 smd paste+0 mask+0: 1(-0.479,0) 2(0.479,0)
  silkscreen extent -0.84,-0.74 0.84,0.74, body extent -1.04,-0.54 1.04,0.54, height 0.25
FP-826629-2-MFG [mm]
  rect 1.55x1.55 hole 1 paste-2539.97 mask+0: 1(-1.27,0)
  round 1.55 hole 1 paste-2539.97 mask+0: 2(1.27,0)
  silkscreen extent -3.3,-1.35 2.64,1.35, body extent -2.54,-1.25 2.54,1.25, height 9.9
FP-ABM8G-MFG [mm]
  rect 1.4x1.2 smd paste+0 mask+0: 1(-1.1,-0.85) 2(1.1,-0.85) 3(1.1,0.85) 4(-1.1,0.85)
  silkscreen extent -2.47,-1.83 1.6,1.83, body extent -1.9,-1.55 1.9,1.55, height 0.25
FP-ACT1210G-800-2P-TL10-MFG [mm]
  rect 1.05x0.6 smd paste+0 mask+0: 1(-1.525,0.5) 2(-1.525,-0.5) 3(1.525,-0.5) 4(1.525,0.5)
  silkscreen extent -2.72,-1.35 1.7,1.35, body extent -1.95,-1.25 1.95,1.25, height 2.5
FP-C0805C475J4RACAUTO-MFG [mm]
  rect 0.95x1.35 smd paste+0 mask+0: 1(-0.75,0) 2(0.75,0)
  silkscreen extent -1.15,-1.05 1.15,1.05, body extent -1.4,-0.85 1.4,0.85, height 0.25
FP-DQA0010A-MFG [mm]
  rrect50% 0.565x0.2 smd paste+0 mask+0: 1(-0.417,1) 2(-0.417,0.5) 4(-0.417,-0.5) 5(-0.417,-1) 6(0.417,-1) 7(0.417,-0.5) 9(0.417,0.5) 10(0.417,1)
  rrect25% 0.565x0.4 smd paste-1000 mask+0: 3(-0.417,0) 8(0.417,0)
  silkscreen extent -1.37,-1.48 0.55,1.48, body extent -0.8,-1.4 0.8,1.4, height 0.25
FP-GRM21B-0_2-e0_2_0_7-IPC_B [mm]
  rect 1.255x1.456 smd paste+0 mask+0: 1(-0.826,0) 2(0.826,0)
  silkscreen extent -1.45,-1.13 1.45,1.13, body extent -1.7,-0.98 1.7,0.98, height 0.25
FP-KXT331LHS-MFG [mm]
  rect 0.55x1.5 smd paste+0 mask+0: 1(-1.625,0) 2(1.625,0)
  silkscreen extent -1.65,-1.15 1.65,1.15, body extent -1.75,-1.1 1.75,1.1, height 0.7
FP-SF-1206FP-MFG [mm]
  rect 1.25x1.65 smd paste+0 mask+0: 1(-1.725,0) 2(1.725,0)
  silkscreen extent -0.72,-0.82 0.72,0.82, body extent -2.45,-0.92 2.45,0.92, height 0.25
"New footprint 1" [mm]
  round 0.6 smd paste-1: 1(0,0)
"PTHV6 M2" [mm]
  round 5 hole 2.5: 1(0,0)
  round 0.5 hole 0.3: 2(0,1.9) 3(1.344,1.344) 4(1.9,0) 5(1.344,-1.344) 6(0,-1.9) 7(-1.9,0) 7(-1.344,-1.344) 7(-1.344,1.344)
QFN50P700X700X100_HS-49N [mm] "QFN, 48-Leads, Body 7.00x7.00mm, Pitch 0.50mm, Thermal Pad 5.05x5.05mm, IPC Medium Density"
  oval 0.85x0.25 smd: 1(-3.4,2.75) 2(-3.4,2.25) 3(-3.4,1.75) 4(-3.4,1.25) 5(-3.4,0.75) 6(-3.4,0.25) 7(-3.4,-0.25) 8(-3.4,-0.75) 9(-3.4,-1.25) 10(-3.4,-1.75) 11(-3.4,-2.25) 12(-3.4,-2.75) 25(3.4,-2.75) 26(3.4,-2.25) 27(3.4,-1.75) 28(3.4,-1.25) 29(3.4,-0.75) 30(3.4,-0.25) 31(3.4,0.25) 32(3.4,0.75) 33(3.4,1.25) 34(3.4,1.75) 35(3.4,2.25) 36(3.4,2.75)
  oval 0.25x0.85 smd: 13(-2.75,-3.4) 14(-2.25,-3.4) 15(-1.75,-3.4) 16(-1.25,-3.4) 17(-0.75,-3.4) 18(-0.25,-3.4) 19(0.25,-3.4) 20(0.75,-3.4) 21(1.25,-3.4) 22(1.75,-3.4) 23(2.25,-3.4) 24(2.75,-3.4) 37(2.75,3.4) 38(2.25,3.4) 39(1.75,3.4) 40(1.25,3.4) 41(0.75,3.4) 42(0.25,3.4) 43(-0.25,3.4) 44(-0.75,3.4) 45(-1.25,3.4) 46(-1.75,3.4) 47(-2.25,3.4) 48(-2.75,3.4)
  rect 5.05x5.05 smd: 49(0,0)
  silkscreen extent -4.42,-3.65 3.65,3.65, body extent -3.5,-3.5 3.5,3.5, height 1
QFN65P600X600X100_HS-29N [mm] "QFN, 28-Leads, Body 6.00x6.00mm, Pitch 0.65mm, Thermal Pad 3.93x3.93mm, IPC Medium Density"
  oval 1.1x0.3 smd: 1(-2.775,1.95) 2(-2.775,1.3) 3(-2.775,0.65) 4(-2.775,0) 5(-2.775,-0.65) 6(-2.775,-1.3) 7(-2.775,-1.95) 15(2.775,-1.95) 16(2.775,-1.3) 17(2.775,-0.65) 18(2.775,0) 19(2.775,0.65) 20(2.775,1.3) 21(2.775,1.95)
  oval 0.3x1.1 smd: 8(-1.95,-2.775) 9(-1.3,-2.775) 10(-0.65,-2.775) 11(0,-2.775) 12(0.65,-2.775) 13(1.3,-2.775) 14(1.95,-2.775) 22(1.95,2.775) 23(1.3,2.775) 24(0.65,2.775) 25(0,2.775) 26(-0.65,2.775) 27(-1.3,2.775) 28(-1.95,2.775)
  rect 3.93x3.93 smd: 29(0,0)
  silkscreen extent -3.92,-3.15 3.15,3.15, body extent -3,-3 3,3, height 1
R0603B [mm] "Chip Resistor, 0603, 2-Leads, Body 1.58x0.85mm, IPC Medium Density"
  rrect25% 0.8x0.95 smd: 1(-0.65,0) 2(0.65,0)
  silkscreen extent -0.2,-0.7 0.2,0.7, body extent -0.82,-0.48 0.82,0.48, height 0.5
RESC1005X40X25ML05T05 [mm] "Chip Resistor, 2-Leads, Body 1.00x0.50mm, IPC Low Density"
  rect 0.65x0.65 smd: 1(-0.5,0) 2(0.5,0)
  body extent -0.53,-0.27 0.53,0.28, height 0.4
RJMG201K21120FR-Footprint-1 [mm]
  round 1.53 hole 1.02: L1(-6.785,-4.57) L2(-6.785,-2.54) L3(6.785,-4.57) L4(6.785,-2.54)
  rect 1.398x1.398 / inner round 1.398 / far side rect 1.398x1.398 hole 0.89: P1(5.715,6.35)
  round 1.398 hole 0.89: P2(4.445,8.89) P3(3.175,6.35) P4(1.905,8.89) P5(0.635,6.35) P6(-0.635,8.89) P7(-1.905,6.35) P8(-3.175,8.89) P9(-4.445,6.35) P10(-5.715,8.89)
  round 2.4 hole 1.6: S1(-7.745,3.05) S2(7.745,3.05)
  round 3.25 hole 3.25 unplated: ""(-5.715,0) ""(5.715,0)
  silkscreen extent -7.88,-10.84 8.63,10.81, body extent -8.87,-10.84 8.87,10.81, height 14.8
SMTC-MTLW-105-05-X-S-190 [mm] "Terminal Assembly, 1x5 Pins, Vertical, 2.54mm Pitch, Male"
  rect 1.52x1.52 hole 1.02: 1(0,0)
  round 1.52 hole 1.02: 2(2.54,0) 3(5.08,0) 4(7.62,0) 5(10.16,0)
  silkscreen extent -1.46,-1.24 11.62,1.24, body extent -1.27,-1.24 11.43,1.24, height 6.35
SOIC-SN8_L [mm] "SOIC, 8-Leads, Body 4.9x3.9mm, Pitch 1.27mm, IPC High Density"
  oval 1.9x0.6 smd: 1(-2.35,1.905) 2(-2.35,0.635) 3(-2.35,-0.635) 4(-2.35,-1.905) 5(2.35,-1.905) 6(2.35,-0.635) 7(2.35,0.635) 8(2.35,1.905)
  silkscreen extent -2.47,-2.5 1,2.88, body extent -2,-2.5 2,2.5, height 1.75
SOT-223_L [mm] "SOT223, 4-Leads, Body 6.5x3.5mm, Pitch 2.3mm, Lead Span 7mm, IPC High Density"
  rect 2.1x0.9 smd: 1(-2.85,2.3) 2(-2.85,0) 3(-2.85,-2.3)
  rect 2.1x3.2 smd: 4(2.85,0)
  silkscreen extent -2.97,-3.35 1.5,3.43, body extent -1.85,-3.35 1.85,3.35, height 1.8
WL-SBCD_0606 [mm] "SMT Bi-color Chip LED Diffuesed, body 1.5x1.6mm"
  rect 0.5x0.8 smd: 1(-0.45,0.8) 2(-0.45,-0.8) 3(0.45,-0.8) 4(0.45,0.8)
  silkscreen extent -0.07,1.47 0.07,1.62, body extent -0.75,-0.8 0.75,0.8, height 0.55

## Part data
C1 C2 C3 C4 C5 C6 C7 C8 C9 C10 C11 C12 C13 C14 C15 C16 C17 C18 C19 C20 C21 C22 C23 C24 C25 C26 C27 C28 C29 C30 C31 C32 C33 C34 C35 C36 C37 C38 C39 C40 C41 C42 C43 C44 C45 C46 C47 C48 C49 C50 C51 C52 C53 C54 C55 C56 C57 C58 C59 C60 C65 C66 C67 C68 C69 C81: library part CMP-001-00058-1, "LARGE PADS, 0402 CAP, CHANGE COMMENT TO MATCH REAL P/N", Capacitor Type=Ceramic, Case/Package=0402, Max Operating Temperature=85°C, Min Operating Temperature=-55°C, Mounting Technology="Surface Mount", Pins=2, RoHS Compliant=Yes
C61 C63 C70: library part CMP-00212-84766729-1, "C0805C475J4RACAUTO Cap Ceramic 4.7uF 16V X7R 5% Pad SMD 0805 125C Automotive T/R", Capacitance=4.7µF, Case/Package=0805, Dielectric=X7R, Dielectric Material=Ceramic, Max Operating Temperature=125°C, Min Operating Temperature=-55°C, Tolerance=5%, Voltage Rating=16V, Height=1.4mm, Material=Ceramic, NexarPartId=84766729, Packaging="Cut Tape", RoHS=Compliant, Voltage Rating (DC)=16V
C62 C64: library part CMP-2007-03222-3, "Chip Multilayer Ceramic Capacitors for General Purpose, 0805, 22uF, X5R, 15%, 20%, 25V", Capacitance=22uF, Case Code (Imperial)=0805, Case Code (Metric)=2012, Dielectric=X5R, Max Operating Temperature=85°C, Min Operating Temperature=-55°C, Package Quantity=3000, Resistor Type=Ceramic, Tolerance=20%, Voltage=25V, Case/Package=0805, Depth=1.25mm, Height=1.25mm, Lead Free="Lead Free", Length=2mm, Material=Ceramic, Mount="Surface Mount", Packaging="Tape and Reel", REACH SVHC="No SVHC", Termination=SMD/SMT, Thickness=0.057inch, Voltage Rating=25V, Voltage Rating (DC)=25V, Weight=0.000335oz, Width=1.25mm
D1 D2 D3 D4: library part CMP-04989-000002-1, "4-CHANNEL LOW-CAPACITANCE SURGE", Ambient Temperature Range High=+125°C, Ambient Temperature Range Low=-40°C, Breakdown Voltage=5.5V, Capacitance=0.55pF, Clamping Voltage=11.5V, Manufacturer="Texas Instruments", Manufacturer Part Number=ESD204DQAR, Package=DQA0010A, Peak Pulse Current=5.5A, Peak Pulse Power=50W, Reverse Standoff Voltage=3.6V, Temperature="-40°C to +125°C", Automotive=No, Category=Diode, ComponentLink2Description=Datasheet, ComponentLink2URL=http://www.ti.com/lit/ds/symlink/esd204.pdf, Device Class L1="Circuit Protection", Device Class L2="TVS Diodes", Device Class L3=unset, Digikey Description="4-CHANNEL LOW-CAPACITANCE SURGE", Direction=Bidirectional, Height=0.55mm, Lead Free=Yes, Mouser Description="4-Channel Low-Capacitance Surge and ESD Protection Diode 10-USON -40 to 125", Number Of Channels=4, Octopart=https://octopart.com/esd204dqar-texas+instruments-89917476, RoHS=TRUE, Standoff Height=0mm, Temperature Range High=+125°C, Temperature Range Low=-40°C
D5 D6 D7 D8: library part CMP-004-00040-2, "Led, Red/Grn, 180Mcd/230Mcd, 624Nm/525Nm Rohs Compliant: Yes", Component Type=Standard, Design Item ID=CMP-004-00034-2, Pins=4, Source=rgled.SchLib
F1: library part CMP-07399-000013-1, "FUSE BOARD MOUNT 2A 63VDC 1206", Case Code (Imperial)=1206, Case Code (Metric)=3216, Current Rating=2A, Max Operating Temperature=105°C, Min Operating Temperature=-20°C, Voltage Rating (DC)=63V, Approvals=UL, Case/Package=1206, Fuse Type="Board Mount (Cartridge Style Excluded)", Mount="Surface Mount", Packaging="Cut Tape", RoHS Compliant=Yes, Series="SinglFuse™ SF-1206FP"
J1: library part CMP-002-00090-1, "Connector RJ45 Receptacle 8 Position Solder Straight Through Hole 1 Port Tray", Max Operating Temperature=70°C, Min Operating Temperature=0°C, Pins=8
J2: library part CMP-002-00103-1, "RF Connector, 2 Contact(s), Male, Panel Mount, Board And Panel Mount, Solder Terminal, Plug", Max Operating Temperature=105°C, Min Operating Temperature=-40°C, Pins=2
J3: library part CMP-2000-05119-1, "Micro USB B Type Receptacle, -55 to 85 degC, 5-Pin SMD, RoHS, Tape and Reel", Color=Black, Current Rating=1.8A, Flammability Rating=UL94V-0, Insulation Resistance=1000MOhms, Manufacturer=FCI, Operating Temperature Range=-55Cto+85C, Brand=FCI, Connector Type=MicroUSBTypeBreceptacle, Contact Material=CopperAlloy, Contact Plating=Gold, Datasheet URL=http://datasheet.octopart.com/10118193-0001LF-FCI-datasheet-55953155.pdf, Datasheet Version="Rev. C, 05/2015", Factory Pack Quantity=1200, Gender=Female, Manufacturer URL=http://www.fci.com/, Mounting Angle=Right, Number of Contacts=5Contact, Packaging=Reel, Product=MicroUSBTypeBConnectors, Product Category=USBConnectors, RoHS=Details, Standard=USB2.0, Termination Style=SMD/SMT
J4 J5 J6 J7: library part CMP-05178-000003-1, "CONN HEADER VERT 2POS 2.54MM", RoHS Compliant=Yes
L1: library part CMP-08256-000023-1, "CMC 80UH 70MA 2LN 3.8KOHM SMD"
MH1 MH2 MH3 MH4: library part CMP-00028-00001-13, "Plated mounting hole with 6 peripheral vias. This is a generic symbol that groups all relevant footprints."
P1: library part CMP-1024-00076-1, "Low Profile .025\" SQ Post Header, Through-hole, Vertical, -55 to 125 degC, 2.54 mm Pitch, 5-Pin, Male, RoHS", Manufacturer=Samtec, Temperature Range="-55 to 125 degC", ComponentLink1Description="Manufacturer URL", ComponentLink1URL=http://www.samtec.com, ComponentLink2Description=Datasheet, ComponentLink2URL=http://www.samtec.com/documents/webfiles/pdf/MTLW_TH.PDF, ComponentLink3Description="Package Specification", ComponentLink3URL=http://www.samtec.com/documents/webfiles/cpdf/MTLW-1XX-XX-XX-X-XXX-XX-XX-MKT1.pdf, DatasheetVersion=F-214, Mounting Technology=Through-hole, Orientation=Vertical, PackageDescription="Low Profile Terminal Assembly", PackageReference=MTLW-105-05-X-S-190, PackageVersion="T, 6/1991", PartNumber=MTLW-105-05-G-S-190, Pitch="2.54 mm", RoHS=True
R1 R2 R3 R4 R5 R6 R7 R8 R9 R10 R11 R13 R15 R16 R18 R64: library part CMP-009-00118-2, "READ THE NAME", Component Type=Standard, Design Item ID=CMP-009-00206-2, Pins=2, Source=0402jump.SchLib
R12 R14 R17 R19 R20 R21 R22 R23 R24 R25 R26 R27 R28 R29 R30 R31 R32 R33 R34 R35 R36 R37 R38 R39 R40 R41 R42 R43 R44 R45 R46 R47 R48 R49 R50 R51 R52 R53 R54 R55 R56 R57 R58 R59 R60 R61 R62 R63 R65 R66 R67 R68 R69 R70 R71 R72 R73 R74 R75 R76 R77 R78 R79 R80 R81 R82: library part CMP-009-00002-14, "Resistor"
SW1: library part CMP-10040-000029-1, "SWITCH TACTILE SPST-NO 0.02A 15V", Current Rating=5A, Flammability Rating="UL94 V-0", Insulation Color=Black, Max Operating Temperature=85°C, Min Operating Temperature=-40°C, Operating Force=240gf, Actuator Type=Standard, Connector Type=USB, Contact Plating=Gold, Gender=Receptacle, Illumination Type=Non-Illuminated, Mechanical Life=500000Cycles, Mount="Surface Mount", Number of Contacts=24, Number of Ports=1, Packaging="Tape and Reel", Switch Function=Off-Mom, Switch Travel=0.13mm, Termination=Solder, Throw Configuration=SPST
TP1 TP2 TP3: library part CMP-00025-3, "Test Point .6mm"
U1: library part CMP-015-00022-4, "LAN8830 Series RGMII Interface Gigabit Ethernet Transceiver - VQFN-48", Case/Package=VQFN, Pins=48
U2: library part CMP-015-00023-4, "100/1000BASE-T1 Rgmii/sgmii Phy", Case/Package=VQFN, Pins=48
U3: library part CMP-0244-00310-1, "Fixed Low Drop Positive Voltage Regulator, 3.3V, 4-Pin SOT-223, Tape and Reel", ComponentLink1Description="Manufacturer URL", ComponentLink1URL=http://www.st.com, ComponentLink2Description=Datasheet, ComponentLink2URL=http://www.st.com/internet/com/TECHNICAL_RESOURCES/TECHNICAL_LITERATURE/DATASHEET/CD00000544.pdf, DatasheetVersion=1/11/2011, PackageDescription="4-Pin SOT-223 Package, 6.5 x 3.5 mm Body, 2.3 mm Pitch, 7 mm Lead Span", PackageReference=SOT-223, PackageVersion=2010
U4: library part CMP-0136-00217-1, "1A, Low Voltage, Low Quiescent Current LDO Regulator, 8-Pin SOIC 150mil, Extended Temperature, Tape and Reel", Code_IPC=SOIC127P600-8, Code_JEDEC=MS-012, DatasheetVersion="revC, Aug-2007", PackageDescription="8-Lead Plastic Small Outline (SN) - Narrow, 3.90mm Body [SOIC]", PackageReference=SOIC-SN8, PackageVersion="revBB, Aug-2009"
U5: library part CMP-020-00021-1, "MCU 8-bit PIC18 PIC RISC 32KB Flash 2.5V/3.3V 28-Pin QFN EP Tube - Rail/Tube", Case/Package=QFN, Max Operating Temperature=85°C, Max Supply Voltage=3.6V, Min Operating Temperature=-40°C, Min Supply Voltage=1.8V, Interface="I2C, SPI, UART, USART, USB", Mounting Technology="Surface Mount", Pins=28, RAM Size=2kB
Y1 Y2: library part CMP-2000-05733-3, "Crystal 25MHz ±20ppm (Tol) ±30ppm (Stability) 18pF FUND 60Ω 4-Pin SMD T/R", Case/Package=CSMD, ESR (Equivalent Series Resistance)=60R, Frequency=25MHz, Frequency Stability=30ppm, Frequency Tolerance=20ppm, Load Capacitance=18pF, Max Operating Temperature=85°C, Min Operating Temperature=-40°C, Operating Frequency="25 MHz", Package Quantity=1000, Depth=2.5mm, Height=0.039inch, Lead Free="Lead Free", Length=3.2mm, Mount="Surface Mount", Number of Pins=4, Packaging="Tape and Reel", Radiation Hardening=No, Series=ABM8G, Series Resistance=60R, Termination=SMD/SMT, Tolerance=20ppm, Width=0.098inch

## Via types
v1: diameter 0.5, hole 0.3, Top Layer to Bottom Layer, tented both sides, 372 vias
v2: diameter 0.5, hole 0.3, Top Layer to Bottom Layer, 115 vias

## Nets (pads, with @x,y where several pads share a name; then routed paths per layer and width w, separated by ;. In a path a pad name is that pad's centre, name@x,y a point inside that pad or via, vN(x,y) a via of type N, cw(c..) or ccw(c..) an arc to the next point about the centre after c; other vN are vias at no path point)
1V1: C64.1 C70.1 R32.1 R33.1 R36.1 R61.1 R63.1 R65.1 R71.2 U4.8 | length 3.4
  Top Layer w0.3: C64.1@70.326,12.5 70.326,12.601 70.803,13.078 72.176,14.451 72.801,14.451 R71.2@72.85,14.5
  other v2: 56.25,20.5 57,20.5 38.25,21.25 39.25,21.25 57,21.25 24.25,31 24.25,31.75 25,31.75
3V3: C62.1 C63.1 C68.1 C69.1 D5.2 D5.3 D6.2 D6.3 D7.2 D7.3 D8.3 J1.L2 J1.L4 P1.2 R31.1 R34.1 R66.1 R67.1 R68.1 R72.1 R74.1 R78.1 R79.2 R80.2 R81.2 R82.1 U3.2 U3.4 U4.1 U4.2 U5.17 | length 55.2
  Top Layer w0.3: R72.1@71.35,2.5 71.357,2.508 71.357,4.643 U4.2@71.365,4.65
  Mid Layer 1 w0.5: v2(67.5,37.5) 68.5,38.5 81.5,38.5 v2(82.5,37.5) 82.957,37.5 83.25,37.207 83.25,34.75 v2(82.5,34) v2(82.5,31)
  Mid Layer 2 w0.5: J1.L2@5.21,13.215 4,14.425 4,25.296 5.21,26.506 5.21,31.19 4.8,31.6 4.8,33.8 8,37 v2(11.5,37)
  other v2: 62.5,14.25 63.25,14.25 64,14.25 35.5,14.5 62.5,15 63.25,15 64,15 57.75,22.5 70.5,24.5
3V3_INH: R41.1 U2.4 U5.22 | length 55.1
  Top Layer w0.3: v2(30.5,12) 30.554,12 30.604,11.95 U5.22@32.225,11.95
  Mid Layer 2 w0.3: v2(30.5,12) 30.526,12 30.776,11.75 58.75,11.75 60.75,13.75 60.75,18.5 57,22.25 57,22.75 57.5,23.25 v2(65,23.25)
  Bottom Layer w0.25: U2.4@64.25,26.6 64.25,25.242 64.75,24.742 R41.1@64.75,23.4
3V3_INT_N: R18.1 R80.1 U5.23 | length 53.5
  Top Layer w0.3: v2(30.5,11.25) 30.554,11.25 30.604,11.3 U5.23@32.225,11.3
  Mid Layer 2 w0.3: v2(30.5,11.25) 31.1,10.65 31.1,7.8 30.75,7.45 30.25,7.45 29.127,8.573 29.127,15.788 22.652,22.263 22.652,33.152 25.798,36.298 39.244,36.298 39.446,36.5 v2(39.5,36.5)
3V3_IRQ_N: U2.35 U5.20 | length 85.2
  Top Layer w0.3: v2(32.499,14.499) 33.001,14.499 33.7,13.8 U5.20@33.7,12.775
  Mid Layer 1 w0.3: v2(32.499,14.499) 32.5,14.5 34.25,14.5 37.098,11.652 67.834,11.652 73.098,16.916 73.098,29.084 71.2,30.982 71.2,32.882 72.7,34.382 72.7,35.4 71.498,36.602 67.591,36.602 65.943,38.25 64,38.25 63.75,38 63.75,36.25 64.25,35.75 66,35.75 66.212,35.962 66.212,36.462 v2(66.25,36.5)
  Bottom Layer w0.25: U2.35@65.25,33.4 65.25,35.5 v2(66.25,36.5)
3V3_MDC: R74.2 U1.37 U2.34 U5.27 | length 83.2
  Top Layer w0.25: U1.37@37.75,33.4 37.75,34 38.648,34.898 39.398,34.898 41.042,36.542 41.042,36.842 42.7,38.5 61.75,38.5 64.5,35.75 65,35.75 65.452,36.202 65.452,36.452 v2(65.5,36.5)
  Top Layer w0.3: v2(30.5,8.75) 30.554,8.75 30.604,8.7 U5.27@32.225,8.7
  Mid Layer 2 w0.3: v2(30.5,8.75) 29.95,9.3 29.95,16.1 23.455,22.595 23.455,32.755 26.195,35.495 40.063,35.495 40.599,36.031 40.599,36.045 41,36.446 v2(41,36.5)
  Bottom Layer w0.25: U2.34@64.75,33.4 64.75,35.75 v2(65.5,36.5)
3V3_MDIO: R79.1 U1.38 U2.33 U5.1 U5.28 | length 84.6
  Top Layer w0.25: U1.38@37.25,33.4 37.25,34 38.5,35.25 39,35.25 40.236,36.486 v2(40.236,36.514) ; v2@40.25,36.5 40.25,36.547 42.703,39 62.25,39 v2(64.75,36.5)
  Top Layer w0.3: v2(30.5,8) 30.554,8 30.604,8.05 U5.28@32.225,8.05 32.549,8.05 32.549,7.726 32.726,7.549 33.05,7.549 U5.1@33.05,7.225
  Mid Layer 2 w0.3: v2(30.5,8) 30.472,8 29.528,8.944 29.528,15.954 23.053,22.429 23.053,32.921 26.029,35.897 39.675,35.897 40.05,36.272 40.05,36.274 40.236,36.46 v2(40.236,36.514)
  Bottom Layer w0.25: U2.33@64.25,33.4 64.25,36 v2(64.75,36.5)
3V3_PIC_nMCLR: P1.1 R81.1 U5.26 | length 11.2
  Top Layer w0.3: P1.1@27.5,4.92 29,6.42 29,8.278 30.072,9.35 U5.26@32.225,9.35
  Bottom Layer w0.3: P1.1@27.5,4.92 29.895,4.92 30.65,5.675 R81.1@30.65,5.75
3V3_PIC_nRESET: C81.1 R76.1 R77.1 R78.2 U5.18 | length 130.3
  Top Layer w0.3: C81.1@19.314,4 19.314,5.314 R77.1@19.5,5.5 ; R77.1@19.4,5.5 19.4,5.575 26,12.175 26,15.75 27,16.75 31,16.75 v2(32.5,15.25) 32.538,15.212 33.288,15.212 35,13.5 U5.18@35,12.775 ; v2(35,5.25) 35,4.7 38.852,0.848 73.848,0.848 76.5,3.5 76.5,26.5 79.098,29.098 82.598,29.098 88,34.5 v2(88,37.75)
  Mid Layer 1 w0.3: v2(32.5,15.25) 32.462,15.212 31.962,15.212 31.75,15 31.75,4.75 32.257,4.243 34.743,4.243 35,4.5 v2(35,5.25)
  Bottom Layer w0.3: R78.2@30.65,13.25 30.749,13.349 30.749,13.999 32,15.25 v2(32.5,15.25)
3V3_PIC_PGC: P1.5 U5.24 | length 7.6
  Top Layer w0.3: P1.5@27.5,15.08 28.6,13.98 28.6,12.122 30.072,10.65 U5.24@32.225,10.65
3V3_PIC_PGD: P1.4 U5.25 | length 5.8
  Top Layer w0.3: P1.4@27.526,12.621 30.147,10 U5.25@32.225,10
3V3_RST_8830: C6.1 R17.2 R28.2 U1.43 U5.3 | length 94.2
  Top Layer w0.25: v2(6,36.25) 8.5,38.75 35.75,38.75 36.75,37.75 v2(36.75,37.25) 36.25,36.75 35.25,36.75 34.602,36.102 34.602,34.491 34.75,34.343 U1.43@34.75,33.4
  Top Layer w0.3: v2(34.25,5.25) 34.25,5.304 34.35,5.404 U5.3@34.35,7.225
  Mid Layer 2 w0.3: v2(34.25,5.25) 34.25,5.75 32.975,7.025 30.1,7.025 28.725,8.4 28.725,15.621 22.25,22.096 22.25,33.35 25.6,36.7 36.146,36.7 36.696,37.25 v2(36.75,37.25)
  Bottom Layer w0.3: R17.2@35.25,37.65 36.296,37.65 36.696,37.25 36.797,37.25 37.026,37.479 C6.1@38.25,37.479
3V3_RST_8870: C35.1 R39.2 R51.2 U2.39 U5.2 | length 92.3
  Top Layer w0.3: v2(33.5,5.25) 33.5,5.304 33.7,5.504 U5.2@33.7,7.225 ; C35.1@70.25,34.729 70.25,34.707 70.436,34.521 70.754,34.521 71.675,33.6 R39.2@71.75,33.6 v2(71.75,31.5)
  Mid Layer 1 w0.3: v2(33.5,5.25) 33.5,5.278 39.472,11.25 68,11.25 73.5,16.75 73.5,29.25 71.75,31 v2(71.75,31.5)
  Bottom Layer w0.25: U2.39@66.4,31.75 78.979,31.75 79.598,31.132 79.618,31.132 81.75,29 87.75,29 88.5,29.75 88.5,30.825 87.65,31.675 R51.2@87.65,31.75
3V3_WAKE_IN: R59.2 R62.1 U2.3 U5.15 | length 42.1
  Top Layer w0.3: U5.15@36.95,12.775 36.95,13.7 39.05,15.8 42.2,15.8 v2(42.5,15.5)
  Mid Layer 1 w0.3: v2(42.5,15.5) 42.549,15.5 42.776,15.273 59.273,15.273 59.75,15.75 61,15.75 67.75,22.5 v2(67.75,23.5)
  Bottom Layer w0.25: U2.3@64.75,26.6 64.75,25.562 66,24.312 66,23.65 R62.1@66.25,23.4 R59.2@67.75,23.4